# Altium PCB PCB1.PcbDoc
Units mm, origin at the board's own origin, x right, y up, seen from the top; angles counter-clockwise.
Board outline 62.79 x 23.06 mm, 2 copper layers (Top Layer, Bottom Layer), stack 1.671 mm thick; 8 components, 4 nets, 21 pads, 0 vias.
Unrouted connection lines stored in the file: 4.
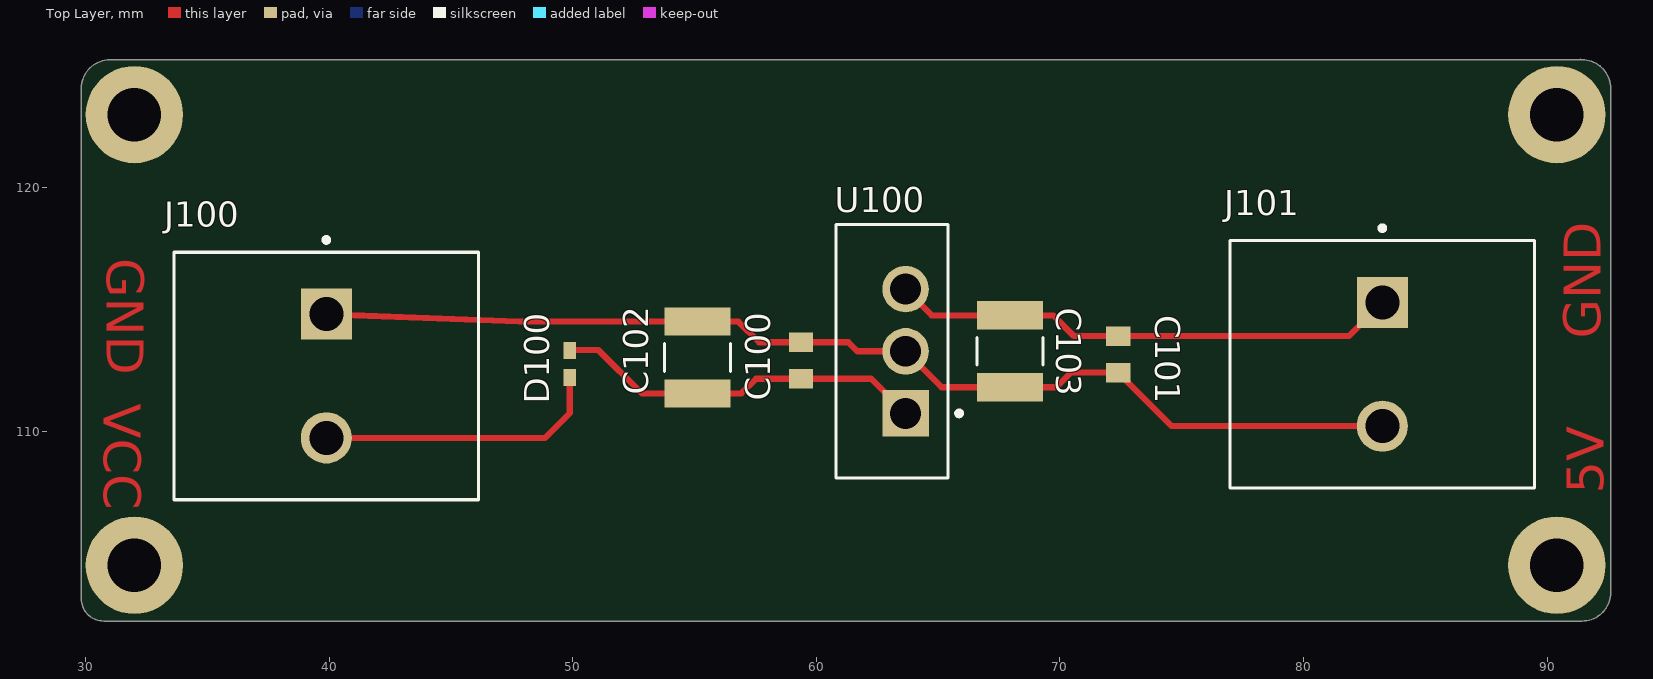
[diagram p0: Top Layer view]
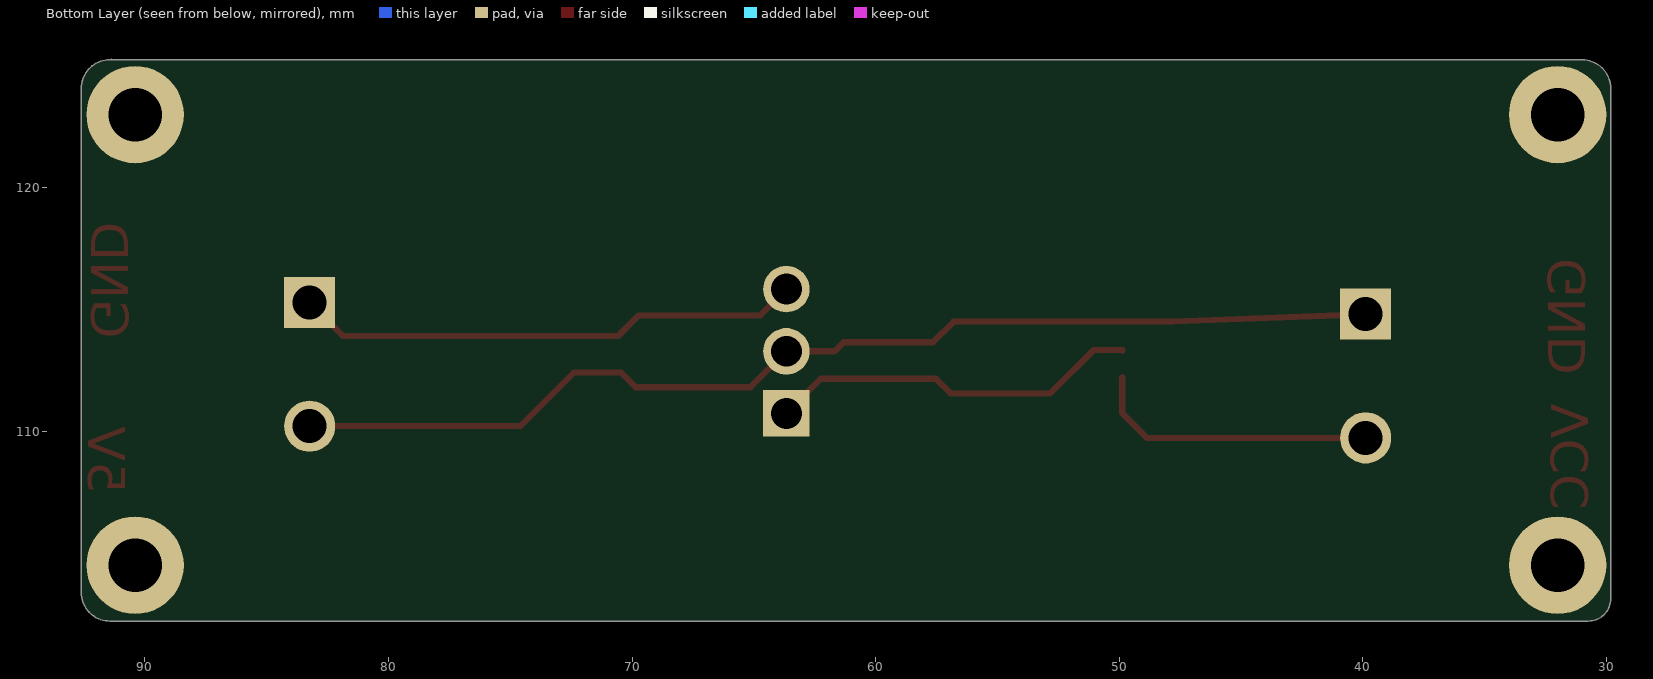
[diagram p1: Bottom Layer view, seen from below]
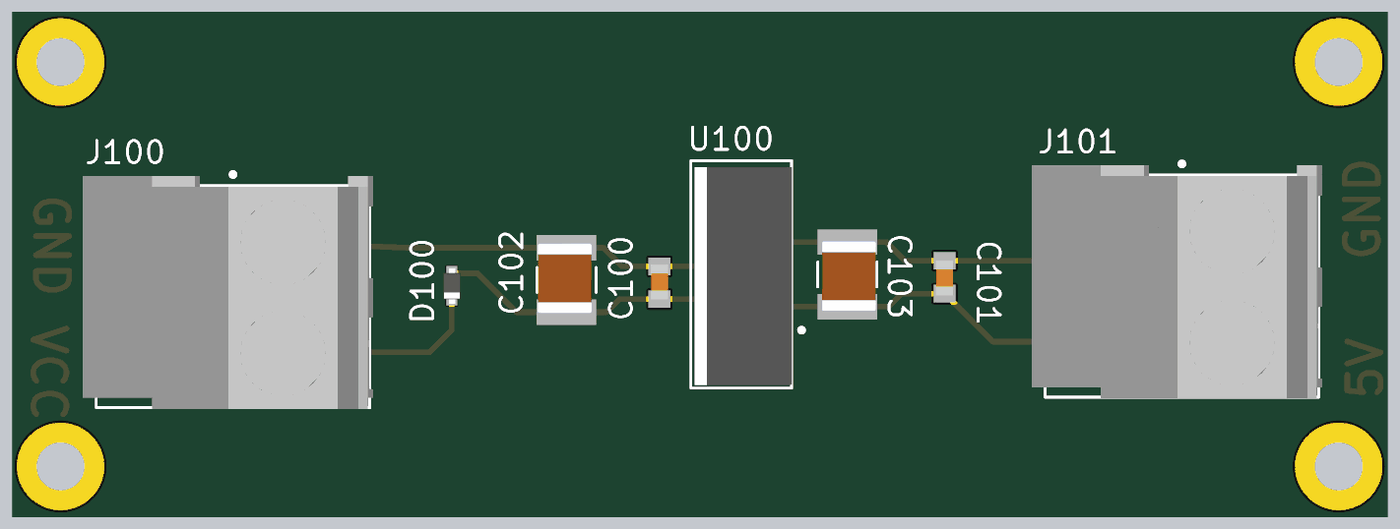
[diagram p2: 3D render of the assembled board from above, using the file's embedded part models]

## Layer stack, top to bottom
Top Solder: solder mask 0.0102, Solder Resist, Dk 3.5
Top Layer: signal copper 0.0356
Dielectric 1: dielectric 1.6, FR-4, Dk 4.6
Bottom Layer: signal copper 0.0356
Bottom Solder: solder mask 0.0102, Solder Resist, Dk 3.5

## Board outline
30.733,102.208 cw(c30.734,102.108) 30.734,102.208 91.44,102.208 ccw(c91.44,103.378) 92.61,103.378 92.61,124.079 ccw(c91.44,124.079) 91.44,125.249 cw(c91.44,125.349) 91.376,125.271 cw(c91.313,125.349) 91.313,125.249 30.985,125.249 cw(c30.988,124.079) 30.988,125.249 30.985,125.249 ccw(c30.988,124.079) 29.818,124.079 29.818,103.124 ccw(c30.734,103.124)

## Design rules (kind name [scope] priority, off if disabled: settings)
Clearance [All] p1: gap=0.254 ignorepadtopadclearanceinfootprint=FALSE except(0: Arc-Hole Track-Hole SMDPad-Hole THPad-Hole Via-Hole Fill-Hole Poly-Hole Region-Hole Text-Text Text-Hole; 0.2: Arc-Text Track-Text SMDPad-Text THPad-Text Via-Text Fill-Text Poly-Text Region-Text)
PolygonConnect [All] p1: connectstyle=Relief reliefconductorwidth=0.254 reliefentries=4 polygonreliefangle="90 Angle" airgapwidth=0.254
RoutingVias [All] p1: holewidth=0.711 width=1.27 viastyle="Through Hole" minholewidth=0.711 minwidth=1.27 maxholewidth=0.711 maxwidth=1.27
SilkToSolderMaskClearance [IsPad] p1: minsilkscreentomaskgap=0.127 clearancetoexposedcopper=TRUE
SolderMaskExpansion [All] p1: expansion=0.102 istentingtop=FALSE
Width [All] p1: maxlimit=1 minlimit=0.15 preferedwidth=0.15
29 further rules are at their usual default settings.

## Components (designator, comment, footprint, x,y, rotation, side; value= is the part's Value field where it differs from the comment)
C100 "0.1uF" CAP_0603 59.365,112.903 r90 top
C101 "0.1uF" CAP_0603 72.39,113.157 r270 top
C102 "0.22uF" CAP-1210-X7R-10uF 55.118,113.03 r90 top
C103 "10uF" CAP-1210-X7R-10uF 67.945,113.284 r270 top
D100 "1PS79SB70" DIODE_SCHOTTKY 49.911,112.903 r90 top
J100 "Input Voltage" HEADER_2 39.446,110.896 r270 top
J101 "Output Voltage" HEADER_2 82.804,111.379 r270 top
U100 "L7805CV" L7805CV 63.663,113.284 r90 top

## Footprints (in the part's own frame and the unit in brackets; to place one, negate y for a bottom-side part, rotate by r counter-clockwise, add the part's x,y. Pads: shape width x height; smd on the part's side, far side on the other; paste and mask are expansions set on the pad)
CAP-1210-X7R-10uF [mm]
  rect 1.16x2.72 smd mask+0.001: 1(-1.475,0) 2(1.475,0)
  silkscreen extent -0.57,-1.35 0.57,1.35, body extent -1.52,-1.17 1.68,1.33, height 1.9
CAP_0603 [mm]
  rect 0.8x1 smd: 1(0.75,0) 2(-0.75,0)
  body extent -0.76,-0.4 0.84,0.4, height 0.47
DIODE_SCHOTTKY [mm]
  rect 0.7x0.5 smd mask+0.05: 1(0.41,0.039) 2(-0.69,0.039)
  body extent -0.95,-0.37 0.65,0.43, height 0.65
HEADER_2 [mm]
  rect 2.1x2.1 hole 1.4: 1(-3.912,0.432)
  round 2.1 hole 1.4: 2(1.168,0.432)
  silkscreen extent -7.06,-5.82 3.71,6.68, body extent -6.9,-6.42 3.76,6.9, height 11
L7805CV [mm]
  rect 1.91x1.91 hole 1.27: 1(-2.55,0)
  round 1.91 hole 1.27: 2(0,0) 3(2.55,0)
  silkscreen extent -5.2,-2.29 5.2,2.86, body extent -5.06,-1.75 4.91,2.69, height 19.68

## Part data
C100 C101: library part CAP_0603_25V, "Capacitor SMD 0603 25V"
C102: library part CAP-1210-X7R-10uF, "CAP CER 10UF 25V X7R 1210 / Cap Ceramic 10uF 25V X7R 10% Pad SMD 1210 125¡ãC T/R", Capacitance=10uF, Case Code (Metric)=3225, Case Code (Imperial)=1210, Dielectric=X7R, Manufacturer=Samsung, Manufacturer Part Number=CL32B106KAJNNNE, Max Operating Temperature=125°C, Min Operating Temperature=-55°C, Package Quantity=1000, Supplier Part Number 1=7661854, Tolerance=10%, Voltage=25V, Case/Package=1210, Category="Ceramic Capacitors", ComponentLink1Description=https://datasheet.ciiva.com/25791/cl32b106kajnnne-25791845.pdf?src-supplier=Digi-Key, ComponentLink1URL=https://datasheet.ciiva.com/25791/cl32b106kajnnne-25791845.pdf?src-supplier=Digi-Key, ComponentLink2Description=https://datasheet.ciiva.com/16437/cl32b106kajnnne-16437180.pdf?src-supplier=Future+Electronics, ComponentLink2URL=https://datasheet.ciiva.com/16437/cl32b106kajnnne-16437180.pdf?src-supplier=Future+Electronics, ComponentLink3Description=https://datasheet.ciiva.com/29202/450857-da-01-en-vs-kondensator-1210-29202679.pdf?src-supplier=Conrad, ComponentLink3URL=https://datasheet.ciiva.com/29202/450857-da-01-en-vs-kondensator-1210-29202679.pdf?src-supplier=Conrad, Contact Plating=Tin, Depth=2.5mm, Height=2.5mm, Length=3.2mm, Material=Ceramic, Mount="Surface Mount", Packaging="Tape and Reel", Pricing 1="1000=0,10400, 2000=0,09700, 5000=0,08800, 10000=0,08400, 25000=0,07900 (GBP)", Radiation Hardening=No, RoHS=Yes, Stock 1=53000, Supplier 1=RSComponents, Thickness=0.106inch, Voltage Rating=25V, Width=0.098inch
C103: library part CAP-1210-X7R-10uF, "CAP CER 10UF 25V X7R 1210 / Cap Ceramic 10uF 25V X7R 10% Pad SMD 1210 125¡ãC T/R", Case Code (Metric)=3225, Case Code (Imperial)=1210, Dielectric=X7R, Manufacturer=Samsung, Manufacturer Part Number=CL32B106KAJNNNE, Max Operating Temperature=125°C, Min Operating Temperature=-55°C, Package Quantity=1000, Supplier Part Number 1=7661854, Tolerance=10%, Voltage=25V, Capacitance=10uF, Case/Package=1210, Category="Ceramic Capacitors", ComponentLink1Description=https://datasheet.ciiva.com/25791/cl32b106kajnnne-25791845.pdf?src-supplier=Digi-Key, ComponentLink1URL=https://datasheet.ciiva.com/25791/cl32b106kajnnne-25791845.pdf?src-supplier=Digi-Key, ComponentLink2Description=https://datasheet.ciiva.com/16437/cl32b106kajnnne-16437180.pdf?src-supplier=Future+Electronics, ComponentLink2URL=https://datasheet.ciiva.com/16437/cl32b106kajnnne-16437180.pdf?src-supplier=Future+Electronics, ComponentLink3Description=https://datasheet.ciiva.com/29202/450857-da-01-en-vs-kondensator-1210-29202679.pdf?src-supplier=Conrad, ComponentLink3URL=https://datasheet.ciiva.com/29202/450857-da-01-en-vs-kondensator-1210-29202679.pdf?src-supplier=Conrad, Contact Plating=Tin, Depth=2.5mm, Height=2.5mm, Length=3.2mm, Material=Ceramic, Mount="Surface Mount", Packaging="Tape and Reel", Pricing 1="1000=0,10400, 2000=0,09700, 5000=0,08800, 10000=0,08400, 25000=0,07900 (GBP)", Radiation Hardening=No, RoHS=Yes, Stock 1=53000, Supplier 1=RSComponents, Thickness=0.106inch, Voltage Rating=25V, Width=0.098inch
D100: library part Schottky_Diode
J100 J101: library part Terminal_Block_2

## Free pads (board coordinates)
  round 4 hole 2.2: MH(32,104.5) MH(32,123) MH(90.4,104.5) MH(90.4,123)

## Nets (pads, with @x,y where several pads share a name; then routed paths per layer and width w, separated by ;. In a path a pad name is that pad's centre, name@x,y a point inside that pad or via, vN(x,y) a via of type N, cw(c..) or ccw(c..) an arc to the next point about the centre after c; other vN are vias at no path point)
+5: C101.2 C103.1 J101.1 U100.3 | length 20.9
  Top Layer w0.254: U100.3 64.738,114.759 C103.1 69.723,114.759 70.575,113.907 C101.2 81.852,113.907 J101.1
GND: C100.1 C101.1 C102.2 C103.2 J100.1 J101.2 pad.MH U100.2 | length 45.6
  Top Layer w0.254: J100.1 47.801,114.505 C102.2 56.794,114.505 57.646,113.653 C100.1 61.316,113.653 61.685,113.284 U100.2 65.138,111.809 C103.2 69.85,111.809 70.448,112.407 C101.1 74.586,110.211 J101.2
NetC100_2: C100.2 C102.1 D100.1 U100.1 | length 15.4
  Top Layer w0.254: D100.1 49.872,113.335 51.052,113.335 52.832,111.555 C102.1 56.921,111.555 57.519,112.153 C100.2 62.244,112.153 U100.1
VCC: D100.2 J100.2 | length 11.9
  Top Layer w0.254: J100.2 48.856,109.728 49.872,110.744 D100.2

## Other copper
Top Layer:
  text "GND" at 30.861,117.094 h1.52 r270
  text "GND" at 92.202,113.792 h1.52 r90
  text "VCC" at 30.734,111.125 h1.52 r270
  text "5V" at 92.329,107.442 h1.52 r90

## Silkscreen, mask and mechanical layers (free items; w line width, h text height)
Mechanical 13:
  lines w0.2: 30.861,125.349 91.313,125.349 ; 30.988,125.349 ccw(c30.988,124.079) 29.718,124.079 29.718,103.124 ccw(c30.734,103.124) 30.734,102.108 91.44,102.108 ccw(c91.44,103.378) 92.71,103.378 92.71,124.079 ccw(c91.44,124.079) 91.44,125.349